# EAGLE board soup_board (EAGLE 9.6.0)

Size 159.66 x 158.95 mm. Coordinates in mm from the lower left corner, seen from the top.
Outline: 0,0.97 158.04,0 159.66,158.95 0.81,158.84 0,0.97
Copper layers (1*16): Top 0.035mm / dielectric 1.5mm / Bottom 0.035mm
Design rules "default": minimum track width 6mil, minimum drill 0.35mm, track to track 6mil, track to pad 6mil, pad to pad 6mil, via to via 6mil, smd to smd 6mil, copper to edge 40mil, drill to drill 6mil, minimum pad ring 10mil, minimum via ring 8mil, stop-mask expansion 4mil, vias tented up to drill 0mil, thermal gap 10mil

## Footprints (pad centres in the part's own frame; a part is rotated, then mirrored left to right if it is on the bottom)
SOD-123 = smd 0.91 x 1.22: A -1.635,0; C 1.635,0
1X04_NO_SILK = drill 1.016 pad 1.88: 1 0,0; 2 2.54,0; 3 5.08,0; 4 7.62,0
AUDIO-JACK = drill 1.3 pad 2.184: RING 5,5; RSH 5,2.5; SLEEVE 0,0; TIP 5,-5; TSH 5,-2.5 | hole 1.2: 0,5; -2.5,5; -2.5,-5; 0,-5; 5,0
AUDIO_JACK_3.5MM_TRRS_SMD_RA = smd 1.2 x 2.5: EARTH 11.3,-3.25; RING1 6.2,3.25; RING2 3.2,3.25; TIP 10.2,3.25 | hole 1.2: 1.6,0; 8.6,0
0402 = smd 0.85 x 0.9: 1 -0.58,0; 2 0.58,0
SPARKFUN_PRO_MICRO = drill 1.016 pad 1.88: 1 -7.62,12.7; 2 -7.62,10.16; 3 -7.62,7.62; 4 -7.62,5.08; 5 -7.62,2.54; 6 -7.62,0; 7 -7.62,-2.54; 8 -7.62,-5.08; 9 -7.62,-7.62; 10 -7.62,-10.16; 11 -7.62,-12.7; 12 -7.62,-15.24; 13 7.62,-15.24; 14 7.62,-12.7; 15 7.62,-10.16; 16 7.62,-7.62; 17 7.62,-5.08; 18 7.62,-2.54; 19 7.62,0; 20 7.62,2.54; 21 7.62,5.08; 22 7.62,7.62; 23 7.62,10.16; 24 7.62,12.7
MXHS-1U = smd 2.55 x 2.5: MX1 7.36,2.54; MX2 -6.09,5.08 | hole 4: 0,0 | hole 3: 3.81,2.54; -2.54,5.08
ROTARY_ENCODER = drill 1: ENC_A 7,2.5; ENC_B 7,-2.5; GND 7,0; SWITCH_A -7,2.5; SWITCH_B -7,-2.5 | drill 2.6: P$6 0,5; P$7 0,-5
MXHS-2U = smd 2.55 x 2.5: MX1 7.36,2.54; MX2 -6.09,5.08 | hole 4: 0,0; -11.9,-8.24; 11.9,-8.24 | hole 3: 3.81,2.54; -2.54,5.08 | hole 3.05: -11.9,7; 11.9,7
FFC_12_PIN_BREAKOUT = drill 0.8 square: 1 -3.81,6.35; 2 -6.35,6.35; 3 -3.81,3.81; 4 -6.35,3.81; 5 -3.81,1.27; 6 -6.35,1.27; 7 -3.81,-1.27; 8 -6.35,-1.27; 9 -3.81,-3.81; 10 -6.35,-3.81; 11 -3.81,-6.35; 12 -6.35,-6.35

## Placement (x,y rotation side)
D1  [SOD-123]  -107.59,-1.23 0 top  (outside the outline)
D2  [SOD-123]  -108.86,-5.04 0 top  (outside the outline)
D3  [SOD-123]  -108.86,-8.85 0 top  (outside the outline)
D4  [SOD-123]  -108.86,-12.66 0 top  (outside the outline)
D5  [SOD-123]  -108.86,-16.47 0 top  (outside the outline)
D6  [SOD-123]  -108.86,-20.28 0 top  (outside the outline)
D7  [SOD-123]  -108.86,-24.09 0 top  (outside the outline)
D8  [SOD-123]  -108.86,-27.9 0 top  (outside the outline)
D9  [SOD-123]  -108.86,-31.71 0 top  (outside the outline)
D10  [SOD-123]  -108.86,-35.52 0 top  (outside the outline)
D11  [SOD-123]  -108.86,-39.33 0 top  (outside the outline)
D12  [SOD-123]  -108.86,-43.14 0 top  (outside the outline)
D13  [SOD-123]  -108.86,-46.95 0 top  (outside the outline)
D14  [SOD-123]  -108.86,-50.76 0 top  (outside the outline)
D15  [SOD-123]  -108.86,-54.57 0 top  (outside the outline)
D16  [SOD-123]  -108.86,-58.38 0 top  (outside the outline)
D17  [SOD-123]  -108.86,-62.19 0 top  (outside the outline)
D18  [SOD-123]  -108.86,-66 0 top  (outside the outline)
D19  [SOD-123]  -108.86,-69.81 0 top  (outside the outline)
D20  [SOD-123]  -108.86,-73.62 0 top  (outside the outline)
D21  [SOD-123]  -108.86,-77.43 0 top  (outside the outline)
D22  [SOD-123]  -108.86,-81.24 0 top  (outside the outline)
D23  [SOD-123]  -108.86,-85.05 0 top  (outside the outline)
D24  [SOD-123]  -108.86,-88.86 0 top  (outside the outline)
D25  [SOD-123]  -108.86,-92.67 0 top  (outside the outline)
D26  [SOD-123]  -108.86,-96.48 0 top  (outside the outline)
D27  [SOD-123]  -108.86,-100.29 0 top  (outside the outline)
D28  [SOD-123]  -108.86,-104.1 0 top  (outside the outline)
D29  [SOD-123]  -108.86,-107.91 0 top  (outside the outline)
D30  [SOD-123]  -108.86,-111.72 0 top  (outside the outline)
D31  [SOD-123]  -108.86,-115.53 0 top  (outside the outline)
D32  [SOD-123]  -108.86,-119.34 0 top  (outside the outline)
D33  [SOD-123]  -108.86,-123.15 0 top  (outside the outline)
D34  [SOD-123]  -108.86,-126.96 0 top  (outside the outline)
D35  [SOD-123]  -108.86,-130.77 0 top  (outside the outline)
D36  [SOD-123]  -108.86,-134.58 0 top  (outside the outline)
D37  [SOD-123]  -126.64,-228.56 0 top  (outside the outline)
D38  [SOD-123]  -126.64,-232.37 0 top  (outside the outline)
I2C_HEADER  [1X04_NO_SILK]  -126.64,-209.51 0 top  (outside the outline)
J1  AUDIO_JACK_3.5MM_PTH  [AUDIO-JACK]  -122.83,-248.88 0 top  (outside the outline)
PAIR_HEADER  AUDIO_JACK_TRRSSMD_RA  [AUDIO_JACK_3.5MM_TRRS_SMD_RA]  -108.86,-140.93 0 top  (outside the outline)
R1  10k  [0402]  -126.64,-236.18 0 top  (outside the outline)
R2  10k  [0402]  -126.64,-239.99 0 top  (outside the outline)
RP2040MICRO  SPARKFUN_PRO_MICRO  [SPARKFUN_PRO_MICRO]  -120.29,-126.96 0 top  (outside the outline)
SWITCH_0  KEYSWITCH-PLAIN-MXHS-1U  [MXHS-1U]  14.66,137.52 0 top
SWITCH_1  KEYSWITCH-PLAIN-MXHS-1U  [MXHS-1U]  33.47,137.52 0 top
SWITCH_2  KEYSWITCH-PLAIN-MXHS-1U  [MXHS-1U]  -21.23,33.06 0 top  (outside the outline)
SWITCH_3  KEYSWITCH-PLAIN-MXHS-1U  [MXHS-1U]  -37.74,33.06 0 top  (outside the outline)
SWITCH_4  KEYSWITCH-PLAIN-MXHS-1U  [MXHS-1U]  -54.25,33.06 0 top  (outside the outline)
SWITCH_5  KEYSWITCH-PLAIN-MXHS-1U  [MXHS-1U]  -70.76,33.06 0 top  (outside the outline)
SWITCH_6  KEYSWITCH-PLAIN-MXHS-1U  [MXHS-1U]  -87.27,33.06 0 top  (outside the outline)
SWITCH_7  KEYSWITCH-PLAIN-MXHS-1U  [MXHS-1U]  -70.76,48.3 0 top  (outside the outline)
SWITCH_8  KEYSWITCH-PLAIN-MXHS-1U  [MXHS-1U]  -54.25,63.54 0 top  (outside the outline)
SWITCH_9  KEYSWITCH-PLAIN-MXHS-1U  [MXHS-1U]  -37.74,78.78 0 top  (outside the outline)
SWITCH_10  KEYSWITCH-PLAIN-MXHS-1U  [MXHS-1U]  -21.23,94.02 0 top  (outside the outline)
SWITCH_11  KEYSWITCH-PLAIN-MXHS-1U  [MXHS-1U]  -103.78,94.02 0 top  (outside the outline)
SWITCH_12  KEYSWITCH-PLAIN-MXHS-1U  [MXHS-1U]  -103.78,33.06 0 top  (outside the outline)
SWITCH_13  KEYSWITCH-PLAIN-MXHS-1U  [MXHS-1U]  -87.27,48.3 0 top  (outside the outline)
SWITCH_14  KEYSWITCH-PLAIN-MXHS-1U  [MXHS-1U]  -70.76,63.54 0 top  (outside the outline)
SWITCH_15  KEYSWITCH-PLAIN-MXHS-1U  [MXHS-1U]  -54.25,78.78 0 top  (outside the outline)
SWITCH_16  KEYSWITCH-PLAIN-MXHS-1U  [MXHS-1U]  -37.74,94.02 0 top  (outside the outline)
SWITCH_17  KEYSWITCH-PLAIN-MXHS-1U  [MXHS-1U]  -21.23,109.26 0 top  (outside the outline)
SWITCH_18  KEYSWITCH-PLAIN-MXHS-1U  [MXHS-1U]  -21.23,48.3 0 top  (outside the outline)
SWITCH_19  KEYSWITCH-PLAIN-MXHS-1U  [MXHS-1U]  -103.78,48.3 0 top  (outside the outline)
SWITCH_20  KEYSWITCH-PLAIN-MXHS-1U  [MXHS-1U]  -87.27,63.54 0 top  (outside the outline)
SWITCH_21  KEYSWITCH-PLAIN-MXHS-1U  [MXHS-1U]  -70.76,78.78 0 top  (outside the outline)
SWITCH_22  KEYSWITCH-PLAIN-MXHS-1U  [MXHS-1U]  -54.25,94.02 0 top  (outside the outline)
SWITCH_23  KEYSWITCH-PLAIN-MXHS-1U  [MXHS-1U]  -37.74,109.26 0 top  (outside the outline)
SWITCH_24  KEYSWITCH-PLAIN-MXHS-1U  [MXHS-1U]  -37.74,48.3 0 top  (outside the outline)
SWITCH_25  KEYSWITCH-PLAIN-MXHS-1U  [MXHS-1U]  -21.23,63.54 0 top  (outside the outline)
SWITCH_26  KEYSWITCH-PLAIN-MXHS-1U  [MXHS-1U]  -103.78,63.54 0 top  (outside the outline)
SWITCH_27  KEYSWITCH-PLAIN-MXHS-1U  [MXHS-1U]  -87.27,78.78 0 top  (outside the outline)
SWITCH_28  KEYSWITCH-PLAIN-MXHS-1U  [MXHS-1U]  -70.76,94.02 0 top  (outside the outline)
SWITCH_29  KEYSWITCH-PLAIN-MXHS-1U  [MXHS-1U]  -54.25,109.26 0 top  (outside the outline)
SWITCH_31  KEYSWITCH-PLAIN-MXHS-1U  [MXHS-1U]  -37.74,63.54 0 top  (outside the outline)
SWITCH_32  KEYSWITCH-PLAIN-MXHS-1U  [MXHS-1U]  -21.23,78.78 0 top  (outside the outline)
SWITCH_33  KEYSWITCH-PLAIN-MXHS-1U  [MXHS-1U]  -103.78,78.78 0 top  (outside the outline)
SWITCH_34  KEYSWITCH-PLAIN-MXHS-1U  [MXHS-1U]  -87.27,94.02 0 top  (outside the outline)
SWITCH_35  KEYSWITCH-PLAIN-MXHS-1U  [MXHS-1U]  -70.76,109.26 0 top  (outside the outline)
SWITCH_36_ENCODER  ROTARY_ENCODER  [ROTARY_ENCODER]  -120.29,-199.35 0 top  (outside the outline)
SWITCH_37_ENCODER  ROTARY_ENCODER  [ROTARY_ENCODER]  -120.29,-218.4 0 top  (outside the outline)
U$1  KEYSWITCH-PLAIN-MXHS-2U  [MXHS-2U]  -115.21,-154.9 0 top  (outside the outline)
U$2  FFC_12_PIN_BREAKOUT  [FFC_12_PIN_BREAKOUT]  -120.29,-179.03 0 top  (outside the outline)

## Library data of the parts
D1-D38 = Components
I2C_HEADER = SparkFun-Connectors; PROD_ID: CONN-09696
J1 = SparkFun-Connectors; PROD_ID: CONN-08774; SF_ID: PRT-08032
PAIR_HEADER = SparkFun-Connectors; PROD_ID: CONN-10676; SF_ID: PRT-12639
R1 R2 = SparkFun-Resistors; PROD_ID: RES-14241
RP2040MICRO = SparkFun-Boards
SWITCH_0 SWITCH_1-SWITCH_29 SWITCH_31-SWITCH_35 U$1 = Keyboard
SWITCH_36_ENCODER SWITCH_37_ENCODER U$2 = rp2040

## Nets
3.3V: R1.2 R2.2 RP2040MICRO.21 U$2.12
COL_0: RP2040MICRO.12 SWITCH_5.MX1 SWITCH_11.MX1 SWITCH_17.MX1 SWITCH_23.MX1 SWITCH_29.MX1 SWITCH_35.MX1
COL_1: RP2040MICRO.20 SWITCH_4.MX1 SWITCH_10.MX1 SWITCH_16.MX1 SWITCH_22.MX1 SWITCH_28.MX1 SWITCH_34.MX1
COL_2: RP2040MICRO.19 SWITCH_3.MX1 SWITCH_9.MX1 SWITCH_15.MX1 SWITCH_21.MX1 SWITCH_27.MX1 SWITCH_33.MX1
COL_3: RP2040MICRO.18 SWITCH_2.MX1 SWITCH_8.MX1 SWITCH_14.MX1 SWITCH_20.MX1 SWITCH_26.MX1 SWITCH_32.MX1
COL_4: RP2040MICRO.17 SWITCH_1.MX1 SWITCH_7.MX1 SWITCH_13.MX1 SWITCH_19.MX1 SWITCH_25.MX1 SWITCH_31.MX1 SWITCH_37_ENCODER.SWITCH_B
COL_5: RP2040MICRO.16 SWITCH_0.MX1 SWITCH_6.MX1 SWITCH_12.MX1 SWITCH_18.MX1 SWITCH_24.MX1 SWITCH_36_ENCODER.SWITCH_B U$1.MX1
ENC_0_A: RP2040MICRO.1 SWITCH_36_ENCODER.ENC_A
ENC_0_B: RP2040MICRO.2 SWITCH_36_ENCODER.ENC_B
ENC_1_A: RP2040MICRO.15 SWITCH_37_ENCODER.ENC_A
ENC_1_B: RP2040MICRO.14 SWITCH_37_ENCODER.ENC_B
GND: I2C_HEADER.4 PAIR_HEADER.RING2 RP2040MICRO.3 RP2040MICRO.4 RP2040MICRO.23 SWITCH_36_ENCODER.GND SWITCH_37_ENCODER.GND U$2.11
N$1: D31.A U$1.MX2
N$2: D37.A SWITCH_36_ENCODER.SWITCH_A
N$3: D38.A SWITCH_37_ENCODER.SWITCH_A
N$4: I2C_HEADER.3
N$5: J1.SLEEVE
N$6: J1.RING
N$7: D1.A SWITCH_0.MX2
N$8: D7.A SWITCH_6.MX2
N$9: D18.A SWITCH_12.MX2
N$10: D17.A SWITCH_13.MX2
N$11: D8.A SWITCH_7.MX2
N$12: D2.A SWITCH_1.MX2
N$13: D3.A SWITCH_2.MX2
N$14: D9.A SWITCH_8.MX2
N$15: D16.A SWITCH_14.MX2
N$16: D4.A SWITCH_3.MX2
N$17: D10.A SWITCH_9.MX2
N$18: D15.A SWITCH_15.MX2
N$19: D5.A SWITCH_4.MX2
N$20: D6.A SWITCH_5.MX2
N$21: D12.A SWITCH_11.MX2
N$22: D13.A SWITCH_17.MX2
N$23: D14.A SWITCH_16.MX2
N$24: D11.A SWITCH_10.MX2
N$25: D19.A SWITCH_18.MX2
N$26: D20.A SWITCH_19.MX2
N$27: D21.A SWITCH_20.MX2
N$28: D22.A SWITCH_21.MX2
N$29: D23.A SWITCH_22.MX2
N$30: D24.A SWITCH_23.MX2
N$31: D30.A SWITCH_24.MX2
N$32: D29.A SWITCH_25.MX2
N$33: D28.A SWITCH_26.MX2
N$34: D27.A SWITCH_27.MX2
N$35: D26.A SWITCH_28.MX2
N$36: D25.A SWITCH_29.MX2
N$37: J1.RSH
N$38: D32.A SWITCH_31.MX2
N$39: D33.A SWITCH_32.MX2
N$40: D34.A SWITCH_33.MX2
N$41: D35.A SWITCH_34.MX2
N$42: D36.A SWITCH_35.MX2
N$43: J1.TSH
N$44: J1.TIP
ROW_0: D1.C D2.C D3.C D4.C D5.C D6.C RP2040MICRO.5
ROW_1: D7.C D8.C D9.C D10.C D11.C D12.C RP2040MICRO.6
ROW_2: D13.C D14.C D15.C D16.C D17.C D18.C RP2040MICRO.7
ROW_3: D19.C D20.C D21.C D22.C D23.C D24.C RP2040MICRO.8
ROW_4: D25.C D26.C D27.C D28.C D29.C D30.C RP2040MICRO.9
ROW_5: D31.C D32.C D33.C D34.C D35.C D36.C RP2040MICRO.10
ROW_6: D37.C D38.C RP2040MICRO.11
SCL: I2C_HEADER.1 PAIR_HEADER.RING1 R1.1 U$2.9
SDA: I2C_HEADER.2 PAIR_HEADER.EARTH R2.1 U$2.10
VCC: PAIR_HEADER.TIP RP2040MICRO.24

## Tracks (layer width: path | path; a pad name or v marks a point on that pad's centre or on a via)
3.3V  (3 unrouted)
COL_0  (6 unrouted)
COL_1  (6 unrouted)
COL_2  (6 unrouted)
COL_3  (6 unrouted)
COL_4  (7 unrouted)
COL_5  (7 unrouted)
ENC_0_A  (1 unrouted)
ENC_0_B  (1 unrouted)
ENC_1_A  (1 unrouted)
ENC_1_B  (1 unrouted)
GND  (7 unrouted)
N$1  (1 unrouted)
N$2  (1 unrouted)
N$3  (1 unrouted)
N$7  (1 unrouted)
N$8  (1 unrouted)
N$9  (1 unrouted)
N$10  (1 unrouted)
N$11  (1 unrouted)
N$12  (1 unrouted)
N$13  (1 unrouted)
N$14  (1 unrouted)
N$15  (1 unrouted)
N$16  (1 unrouted)
N$17  (1 unrouted)
N$18  (1 unrouted)
N$19  (1 unrouted)
N$20  (1 unrouted)
N$21  (1 unrouted)
N$22  (1 unrouted)
N$23  (1 unrouted)
N$24  (1 unrouted)
N$25  (1 unrouted)
N$26  (1 unrouted)
N$27  (1 unrouted)
N$28  (1 unrouted)
N$29  (1 unrouted)
N$30  (1 unrouted)
N$31  (1 unrouted)
N$32  (1 unrouted)
N$33  (1 unrouted)
N$34  (1 unrouted)
N$35  (1 unrouted)
N$36  (1 unrouted)
N$38  (1 unrouted)
N$39  (1 unrouted)
N$40  (1 unrouted)
N$41  (1 unrouted)
N$42  (1 unrouted)
ROW_0  (6 unrouted)
ROW_1  (6 unrouted)
ROW_2  (6 unrouted)
ROW_3  (6 unrouted)
ROW_4  (6 unrouted)
ROW_5  (6 unrouted)
ROW_6  (2 unrouted)
SCL  (3 unrouted)
SDA  (3 unrouted)
VCC  (1 unrouted)